# EAGLE board Mainboard (EAGLE 6.2)
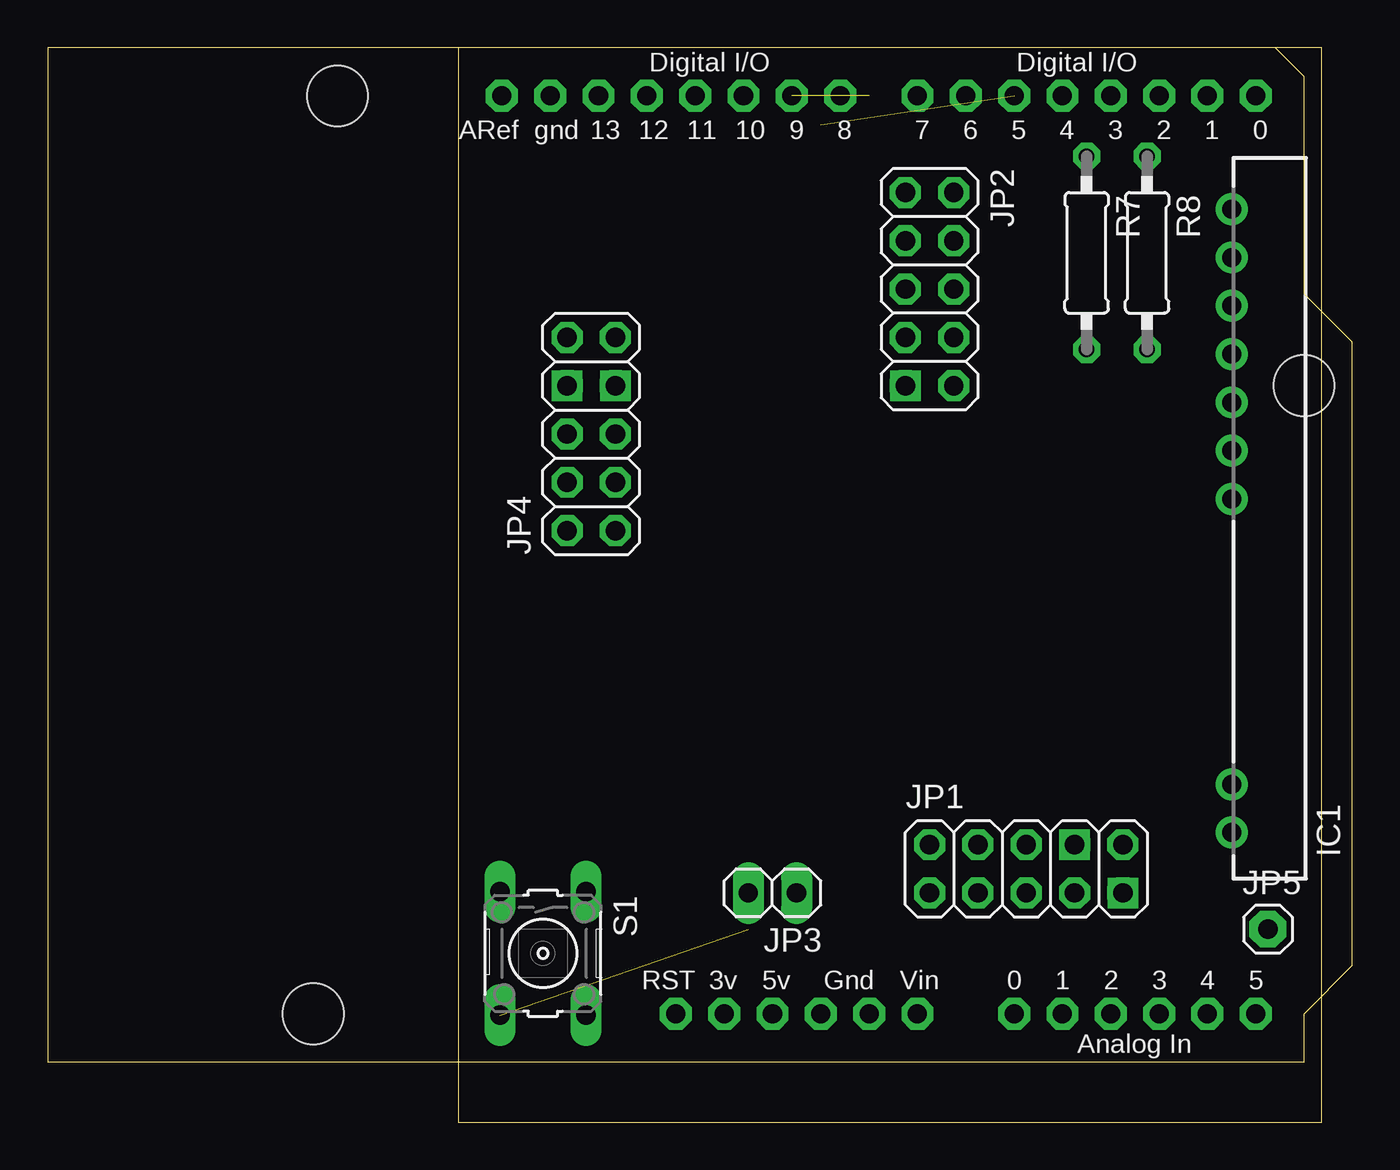
[diagram p0: board, top side]
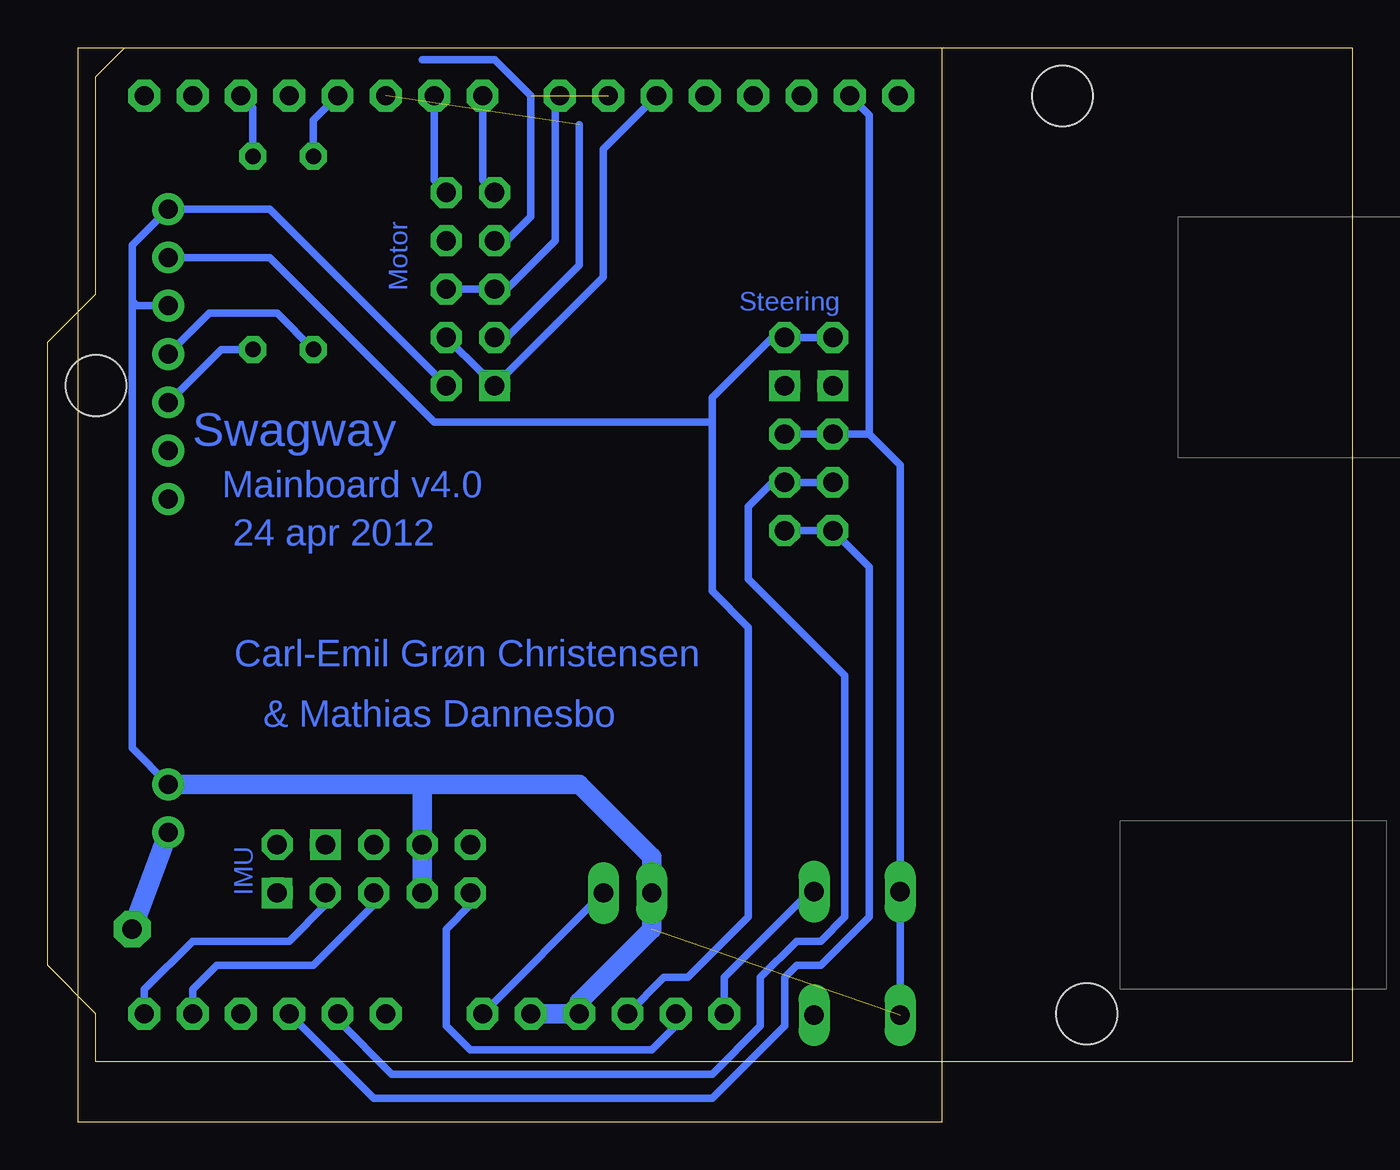
[diagram p1: board, bottom side, seen from below]

Size 45.39 x 56.5 mm. Coordinates in mm from the lower left corner, seen from the top.
Outline: 0,0 45.39,0 45.39,56.5 0,56.5 0,0
Copper layers (1*16): Top 0.035mm / dielectric 1.5mm / Bottom 0.035mm
Design rules: minimum track width 12mil, minimum drill 24mil, track to track 8mil, track to pad 8mil, pad to pad 8mil, via to via 8mil, smd to smd 8mil, copper to edge 40mil, drill to drill 8mil, minimum pad ring 12mil, minimum via ring 12mil, stop-mask expansion 4mil, vias tented up to drill 0mil, thermal gap 10mil

## Footprints (pad centres in the part's own frame; a part is rotated, then mirrored left to right if it is on the bottom)
SIL9 = drill 1 pad 1.676: 1 -16.51,2.54; 2 -13.97,2.54; 3 1.03,2.54; 4 3.57,2.54; 5 6.11,2.54; 6 8.65,2.54; 7 11.19,2.54; 8 13.73,2.54; 9 16.27,2.54
2X05 = drill 1.016 octagon: 1 -5.08,-1.27; 2 -5.08,1.27; 3 -2.54,-1.27; 4 -2.54,1.27; 5 0,-1.27; 6 0,1.27; 7 2.54,-1.27; 8 2.54,1.27; 9 5.08,-1.27; 10 5.08,1.27
1X02 = drill 1.016 long: 1 -1.27,0; 2 1.27,0
1X01 = drill 1.016 pad 1.93 octagon: 1 0,0
0207/10 = drill 0.813 octagon: 1 -5.08,0; 2 5.08,0
B3F-10XX = drill 1.016 long: 1 -3.251,2.261; 2 3.251,2.261; 3 -3.251,-2.261; 4 3.251,-2.261
ARDUINO = drill 1 pad 1.676 octagon: 3V 35.56,2.54; 5V 38.1,2.54; A0 50.8,2.54; A1 53.34,2.54; A2 55.88,2.54; A3 58.42,2.54; A4 60.96,2.54; A5 63.5,2.54; AREF 23.876,50.8; D0 63.5,50.8; D1 60.96,50.8; D2 58.42,50.8; D3 55.88,50.8; D4 53.34,50.8; D5 50.8,50.8; D6 48.26,50.8; D7 45.72,50.8; D8 41.656,50.8; D9 39.116,50.8; D10 36.576,50.8; D11 34.036,50.8; D12 31.496,50.8; D13 28.956,50.8; GND 26.416,50.8; GND1 43.18,2.54; GND2 40.64,2.54; RESET 33.02,2.54; VIN 45.72,2.54 | hole 3.2: 15.24,50.8; 66.04,35.56; 13.97,2.54

## Placement (x,y rotation side)
IC1  ER400RTS-02  [SIL9]  43.18,31.75 90 top
JP1  IMU  [2X05]  29.85,13.34 0 top
JP2  Motorcontroller  [2X05]  24.76,43.81 270 top
JP3  9V Batt  [1X02]  16.51,12.07 180 top
JP4  Steering  [2X05]  6.99,36.2 90 top
JP5  [1X01]  42.55,10.16 0 top
R7  10k  [0207/10]  33.02,45.72 270 top
R8  10k  [0207/10]  36.2,45.72 270 top
S1  [B3F-10XX]  4.44,8.89 270 top
U$1  ARDUINOUNO  [ARDUINO]  -21.59,3.17 0 top

## Library data of the parts
IC1 = lprs; MPN: ER400RS; OC_FARNELL: 5096522; OC_NEWARK: 13J9292
JP1-JP4 = pinhead
JP5 U$1 = adafruit
R7 R8 = rcl
S1 = switch-omron; MPN: B3F-1000; OC_FARNELL: 176432; OC_NEWARK: 36M3542

## Nets
+3V3: JP1.1 U$1.3V
+5V: IC1.8 JP4.9 JP4.10 U$1.5V
GND: IC1.2 IC1.7 IC1.9 JP1.3 JP2.10 JP3.2 JP4.5 JP4.6 S1.4 U$1.GND U$1.GND1 U$1.GND2
N$1: JP2.1 U$1.D7
N$4: JP2.2 U$1.D6
N$5: JP2.6 U$1.D8
N$6: JP2.8 U$1.D10
N$8: JP2.3 U$1.D9
N$9: R8.1 U$1.D2
N$12: R7.1 U$1.D4
N$13: JP4.3 JP4.4 U$1.A1
N$14: JP4.1 JP4.2 U$1.A2
N$15: S1.1 U$1.RESET
N$16: JP2.7 U$1.D5
N$18: IC1.5 R8.2
N$19: IC1.6 R7.2
N$21: IC1.1 JP5.1
N$26: JP1.7 U$1.A5
N$39: JP3.1 U$1.VIN
N$41: JP1.5 U$1.A4

## Tracks (layer width: path | path; a pad name or v marks a point on that pad's centre or on a via)
+3V3
  Bottom 0.406: U$1.3V 13.97,5.08 15.24,3.81 24.76,3.81 26.04,5.08 26.04,10.16 24.76,11.43 JP1.1
+5V
  Bottom 0.406: U$1.5V 14.61,7.62 13.33,7.62 10.16,10.79 10.16,26.04 12.06,27.94 12.06,36.83 | JP4.10 JP4.9 8.89,41.27 12.06,38.1 12.06,36.83 | IC1.8 35.32,45.48 26.67,36.83 12.06,36.83
GND  (1 unrouted)
  Bottom 0.406: JP4.5 JP4.6 3.81,36.2 | 42.55,43.18 42.55,46.11 IC1.9 35.32,48.02 JP2.10 | 42.55,43.18 42.55,19.69 IC1.2 | IC1.7 42.3,42.94 42.55,43.18 | U$1.GND 3.81,52.96 3.81,36.2 | S1.4 2.18,34.57 3.81,36.2
  Bottom 1.016: IC1.2 27.3,17.78 | 27.3,17.78 19.05,17.78 15.24,13.97 JP3.2 15.24,10.16 19.05,6.35 U$1.GND2 U$1.GND1 | JP1.3 27.3,17.78
N$1
  Bottom 0.406: U$1.D7 24.13,49.53 JP2.1
N$2  (via drill 1)
  other vias: 34.93,12.07
N$3  (via drill 1)
  other vias: 32.39,14.61
N$4
  Bottom 0.406: U$1.D6 26.67,49.53 JP2.2
N$5
  Bottom 0.406: JP2.6 22.86,43.81 20.32,46.35 20.32,53.72 U$1.D8
N$6
  Bottom 0.406: U$1.D10 17.78,51.18 17.78,44.45 22.86,39.37 24.13,39.37 JP2.8
N$7  (via drill 1)
  other vias: 23.49,38.73
N$8  (1 unrouted)
  Bottom 0.406: 27.3,55.88 23.49,55.88 21.59,53.97 21.59,47.62 22.86,46.35 JP2.3
N$9
  Bottom 0.406: U$1.D2 36.2,53.34 R8.1
N$10  (via drill 1)
  other vias: 8.25,38.73
N$11  (via drill 1)
  other vias: 5.72,38.73
N$12
  Bottom 0.406: U$1.D4 33.02,52.7 R7.1
N$13
  Bottom 0.406: JP4.4 JP4.3 8.89,33.66 10.16,32.38 10.16,28.57 5.08,23.5 5.08,10.79 6.35,9.52 7.62,9.52 9.52,7.62 9.52,5.08 12.06,2.54 28.89,2.54 31.75,5.4 U$1.A1
N$14
  Bottom 0.406: JP4.1 JP4.2 3.81,29.21 3.81,10.79 6.35,8.25 7.62,8.25 8.25,7.62 8.25,5.08 12.06,1.27 29.85,1.27 U$1.A2
N$15
  Bottom 0.406: S1.1 6.91,12.14 11.43,7.62 U$1.RESET
N$16  (1 unrouted)
  Bottom 0.406: JP2.7 22.86,41.27 19.05,45.08 19.05,52.45
N$18
  Bottom 0.406: IC1.5 37.86,40.64 R8.2
N$19
  Bottom 0.406: IC1.6 38.5,42.54 34.93,42.54 R7.2
N$21
  Bottom 1.016: IC1.1 JP5.1
N$26
  Bottom 0.406: U$1.A5 41.91,6.98 39.37,9.52 34.29,9.52 32.39,11.43 JP1.7
N$39
  Bottom 0.406: U$1.VIN JP3.1
N$41
  Bottom 0.406: U$1.A4 39.37,6.98 38.1,8.25 33.02,8.25 29.85,11.43 JP1.5

## Text on the board
Bottom: Motor | Steering | Swagway | Mainboard v4.0 | 24 apr 2012 | Carl-Emil Grøn Christensen | & Mathias Dannesbo | IMU